# Altium PCB FrontPanel.PcbDoc
Units mil, origin at the board's own origin, x right, y up, seen from the top; angles counter-clockwise.
Board outline 8752 x 5744 mil, 2 copper layers (Top Layer, Bottom Layer); 17 components, 0 nets, 6 pads, 0 vias.
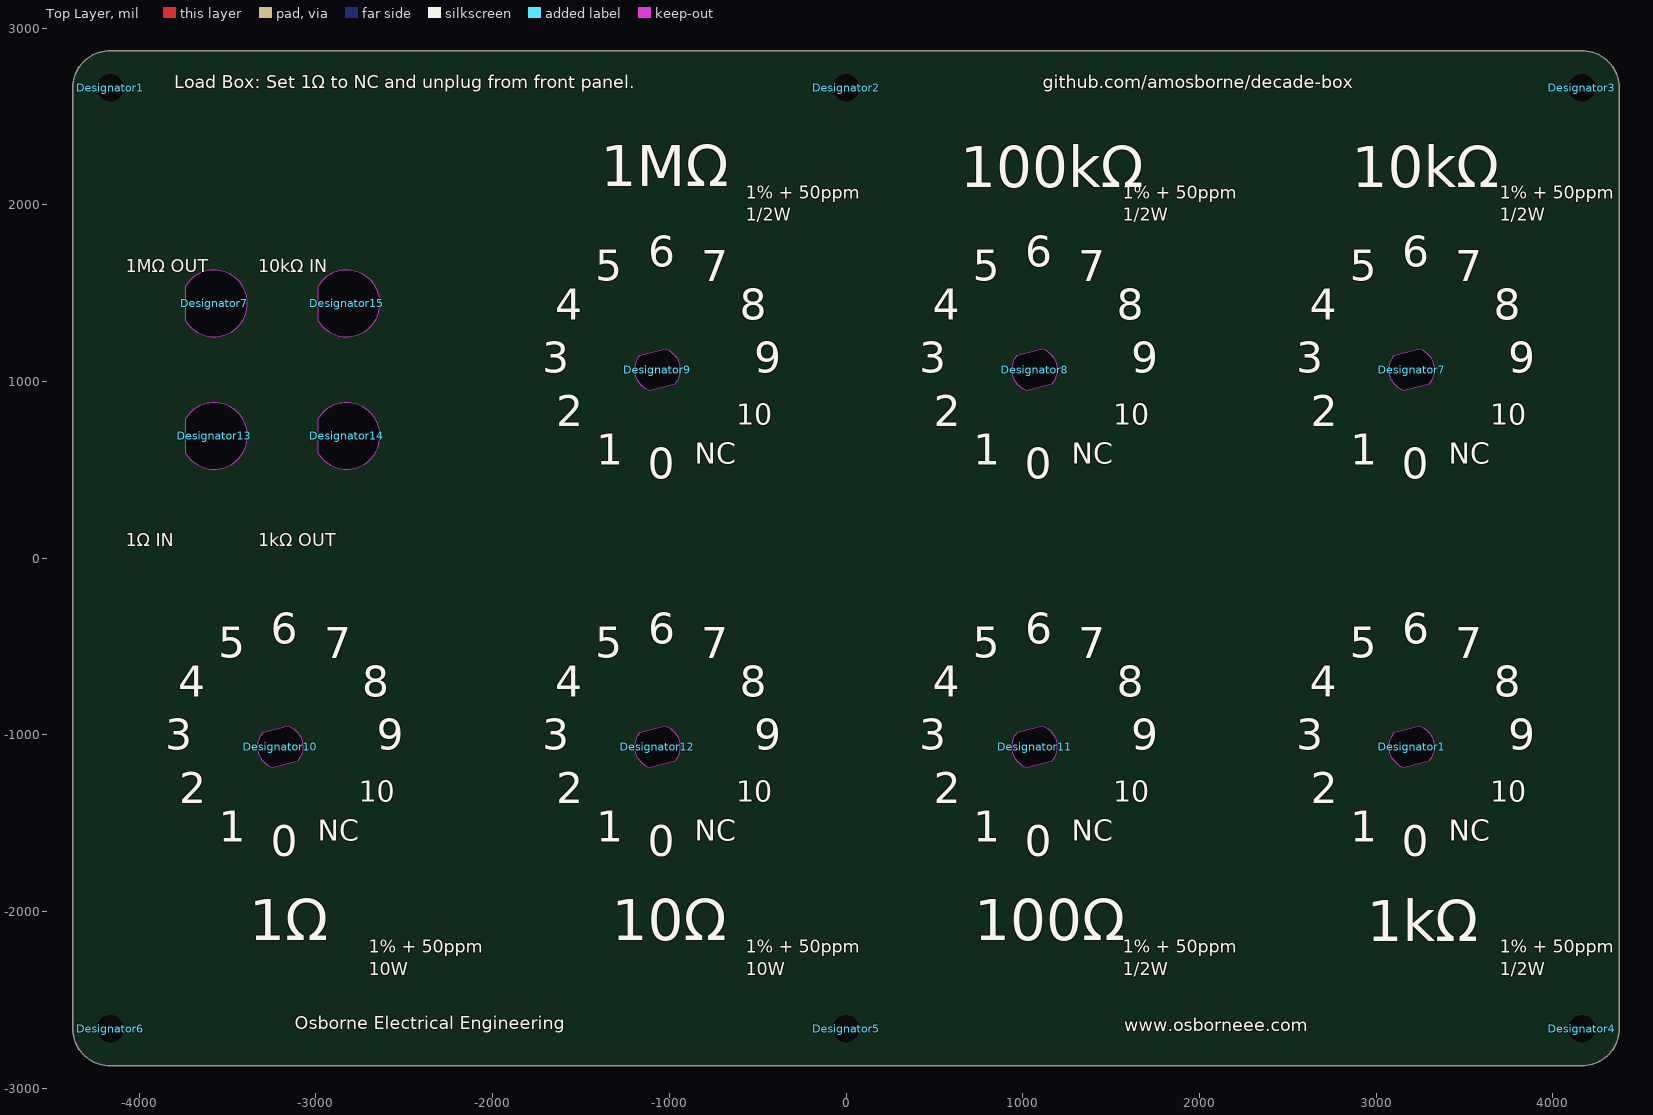
[diagram p0: Top Layer view]
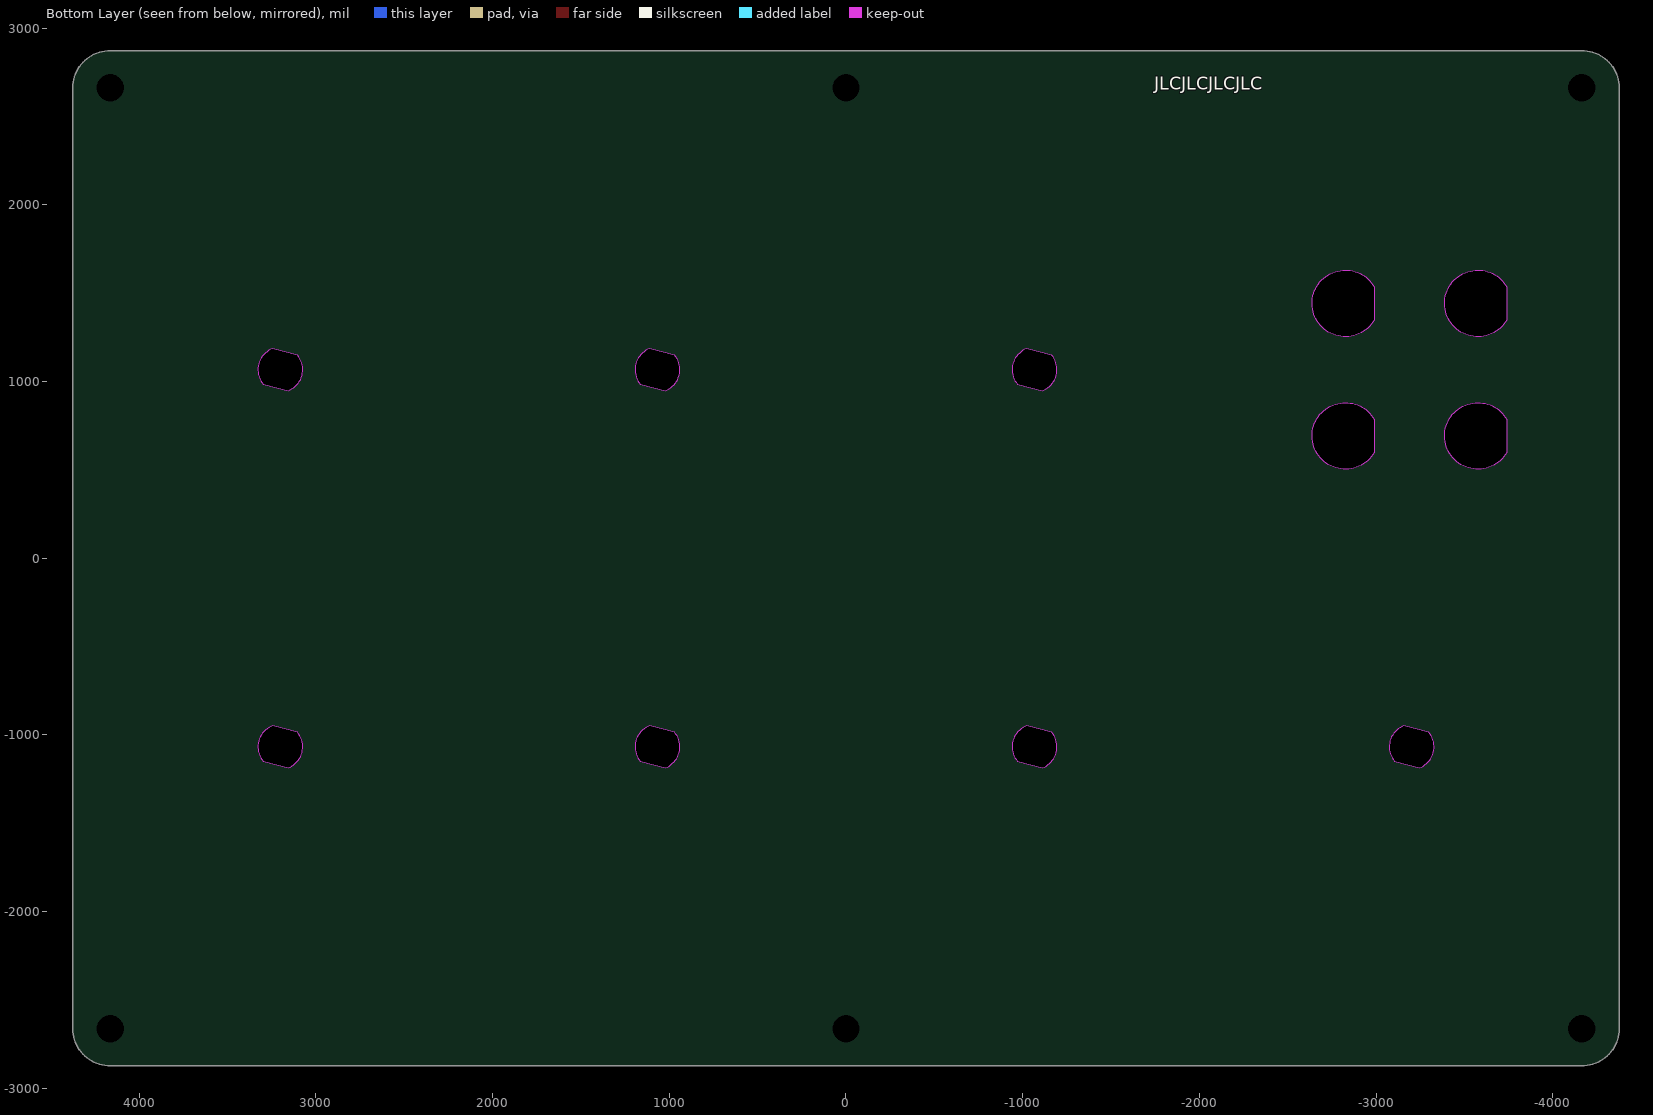
[diagram p1: Bottom Layer view, seen from below]

## Layer stack, top to bottom
Top Solder: solder mask 0.4, Solder Resist, Dk 3.5
Top Layer: signal copper 1.4
Dielectric 1: dielectric 12.6, FR-4, Dk 4.8
Bottom Layer: signal copper 1.4
Bottom Solder: solder mask 0.4, Solder Resist, Dk 3.5

## Board outline
-4376,-2663 ccw(c-4165,-2661) -4163,-2872 4163,-2872 ccw(c4165,-2661) 4376,-2663 4376,2663 ccw(c4165,2661) 4163,2872 -4163,2872 ccw(c-4165,2661) -4376,2663

## Design rules (kind name [scope] priority, off if disabled: settings)
Clearance [All] p1: gap=10 ignorepadtopadclearanceinfootprint=FALSE except(0: Arc-Hole Track-Hole SMDPad-Hole THPad-Hole Via-Hole Fill-Hole Poly-Hole Region-Hole Text-Hole)
PolygonConnect [All] p1: connectstyle=Relief reliefconductorwidth=10 reliefentries=4 polygonreliefangle="90 Angle" airgapwidth=10
RoutingVias [All] p1: holewidth=28 width=50 viastyle="Through Hole" minholewidth=28 minwidth=50 maxholewidth=28 maxwidth=50
SolderMaskExpansion [All] p1: expansion=4 istentingtop=FALSE
Width [All] p1: maxlimit=10 minlimit=10 preferedwidth=10
30 further rules are at their usual default settings.

## Components (designator, comment, footprint, x,y, rotation, side; value= is the part's Value field where it differs from the comment)
Designator1 "Comment" ROTARY 3201,-1067 r285 top
Designator1 "MTGHOLE" MTGHOLE -4163,2663 r0 top locked
Designator2 "MTGHOLE" MTGHOLE 0,2663 r0 top locked
Designator3 "MTGHOLE" MTGHOLE 4163,2663 r0 top locked
Designator4 "MTGHOLE" MTGHOLE 4163,-2663 r0 top locked
Designator5 "MTGHOLE" MTGHOLE 0,-2663 r0 top locked
Designator6 "MTGHOLE" MTGHOLE -4163,-2663 r0 top locked
Designator7 "Comment" BINDING -3576,1442 r90 top
Designator7 "Comment" ROTARY 3201,1067 r285 top
Designator8 "Comment" ROTARY 1067,1067 r285 top
Designator9 "Comment" ROTARY -1067,1067 r285 top
Designator10 "Comment" ROTARY -3201,-1067 r285 top
Designator11 "Comment" ROTARY 1067,-1067 r285 top
Designator12 "Comment" ROTARY -1067,-1067 r285 top
Designator13 "Comment" BINDING -3576,692 r90 top
Designator14 "Comment" BINDING -2826,692 r90 top
Designator15 "Comment" BINDING -2826,1442 r90 top

## Footprints (in the part's own frame and the unit in brackets; to place one, negate y for a bottom-side part, rotate by r counter-clockwise, add the part's x,y. Pads: shape width x height; smd on the part's side, far side on the other; paste and mask are expansions set on the pad)
BINDING [mil]
  Keep-Out Layer board cut-out: -94.05,163.38 -157.38,103.77 -187.22,22.07 -177.2,-64.32 -129.46,-137.03 -54.17,-180.56 32.66,-185.67 112.53,-151.24 168.45,-84.63 188.51,0 188.52,0 177.12,64.55 144.31,121.3 94.05,163.38 94.05,163.38 93.92,163.43 93.79,163.45 93.79,163.45 -93.79,163.45 -93.92,163.43 -94.05,163.38
  body extent -220,-220 220,220, height 810
MTGHOLE [mil]
  round 0 hole 155 unplated: 0(0,0)
ROTARY [mil]
  Keep-Out Layer board cut-out: -104,-72.89 -104,72.89 -58.62,112.66 0,127 58.62,112.66 104,72.89 104,72.89 104,-72.89 58.62,-112.66 0,-127 -58.62,-112.66 -104,-72.89
  body extent -400,-400 413,400, height 700

## Nets (pads, with @x,y where several pads share a name; then routed paths per layer and width w, separated by ;. In a path a pad name is that pad's centre, name@x,y a point inside that pad or via, vN(x,y) a via of type N, cw(c..) or ccw(c..) an arc to the next point about the centre after c; other vN are vias at no path point)
pads on no net: Designator1.0 Designator2.0 Designator3.0 Designator4.0 Designator5.0 Designator6.0

## Silkscreen, mask and mechanical layers (free items; w line width, h text height)
Top Overlay:
  text "Load Box: Set 1Ω to NC and unplug from front panel." at -3801.82,2634.48 h125
  text "github.com/amosborne/decade-box" at 1114.74,2634.42 h125
  text "1MΩ" at -1386.57,2029.21 h400
  text "100kΩ" at 645.78,2024.39 h400
  text "10kΩ" at 2862.92,2024.39 h400
  text "1% + 50ppm / 1/2W" at -567,1884 h125
  text "1% + 50ppm / 1/2W" at 1567,1884 h125
  text "1% + 50ppm / 1/2W" at 3701,1884 h125
  text "1MΩ OUT" at -4076,1592 h125
  text "10kΩ IN" at -3326,1592 h125
  text "1Ω IN" at -4076,42 h125
  text "1kΩ OUT" at -3326,42 h125
  text "10Ω" at -1326.4,-2237.5 h400
  text "100Ω" at 724.47,-2237.5 h400
  text "1Ω" at -3377.26,-2239.35 h400
  text "1kΩ" at 2946.05,-2244.9 h400
  text "1% + 50ppm / 10W" at -2701,-2384 h125
  text "1% + 50ppm / 10W" at -567,-2384 h125
  text "1% + 50ppm / 1/2W" at 1567,-2384 h125
  text "1% + 50ppm / 1/2W" at 3701,-2384 h125
  text "Osborne Electrical Engineering" at -3119.24,-2691.58 h125
  text "www.osborneee.com" at 1574.94,-2702.45 h125
Bottom Overlay:
  text "JLCJLCJLCJLC" at -1744.09,2626.61 h125
Board Shape:
  the board outline again, w1

## Dimensions
-4000,-2000 to -3000,-2000 on Mechanical 4
-4000,-2000 to -4000,-1000 on Mechanical 4

## Text inside footprints (layer, text, board x,y; h text height)
Designator1: Top Overlay "9" at 3747.4,-1144.62 h300; Top Overlay "0" at 3145.46,-1744.62 h300; Top Overlay "8" at 3665.77,-844.62 h300; Top Overlay "7" at 3448.51,-624.59 h300; Top Overlay "6" at 3147.54,-544.62 h300; Top Overlay "5" at 2850.18,-623.61 h300; Top Overlay "4" at 2623.76,-844.62 h300; Top Overlay "3" at 2549.07,-1144.62 h300; Top Overlay "2" at 2629.32,-1446.01 h300; Top Overlay "1" at 2853.37,-1664.79 h300; Top Overlay "10" at 3645.65,-1418.74 h200; Top Overlay "NC" at 3411.23,-1638.35 h200
Designator7: Top Overlay "NC" at 3411.23,495.65 h200; Top Overlay "10" at 3645.65,715.26 h200; Top Overlay "1" at 2853.37,469.21 h300; Top Overlay "2" at 2629.32,687.99 h300; Top Overlay "3" at 2549.07,989.38 h300; Top Overlay "4" at 2623.76,1289.38 h300; Top Overlay "5" at 2850.18,1510.39 h300; Top Overlay "6" at 3147.54,1589.38 h300; Top Overlay "7" at 3448.51,1509.41 h300; Top Overlay "8" at 3665.77,1289.38 h300; Top Overlay "0" at 3145.46,389.38 h300; Top Overlay "9" at 3747.4,989.38 h300
Designator8: Top Overlay "9" at 1613.4,989.38 h300; Top Overlay "0" at 1011.46,389.38 h300; Top Overlay "8" at 1531.77,1289.38 h300; Top Overlay "7" at 1314.51,1509.41 h300; Top Overlay "6" at 1013.54,1589.38 h300; Top Overlay "5" at 716.18,1510.39 h300; Top Overlay "4" at 489.76,1289.38 h300; Top Overlay "3" at 415.07,989.38 h300; Top Overlay "2" at 495.32,687.99 h300; Top Overlay "1" at 719.37,469.21 h300; Top Overlay "10" at 1511.65,715.26 h200; Top Overlay "NC" at 1277.23,495.65 h200
Designator9: Top Overlay "NC" at -856.77,495.65 h200; Top Overlay "10" at -622.35,715.26 h200; Top Overlay "1" at -1414.63,469.21 h300; Top Overlay "2" at -1638.68,687.99 h300; Top Overlay "3" at -1718.93,989.38 h300; Top Overlay "4" at -1644.24,1289.38 h300; Top Overlay "5" at -1417.82,1510.39 h300; Top Overlay "6" at -1120.46,1589.38 h300; Top Overlay "7" at -819.49,1509.41 h300; Top Overlay "8" at -602.23,1289.38 h300; Top Overlay "0" at -1122.54,389.38 h300; Top Overlay "9" at -520.6,989.38 h300
Designator10: Top Overlay "9" at -2654.6,-1144.62 h300; Top Overlay "0" at -3256.54,-1744.62 h300; Top Overlay "8" at -2736.23,-844.62 h300; Top Overlay "7" at -2953.49,-624.59 h300; Top Overlay "6" at -3254.46,-544.62 h300; Top Overlay "5" at -3551.82,-623.61 h300; Top Overlay "4" at -3778.24,-844.62 h300; Top Overlay "3" at -3852.93,-1144.62 h300; Top Overlay "2" at -3772.68,-1446.01 h300; Top Overlay "1" at -3548.63,-1664.79 h300; Top Overlay "10" at -2756.35,-1418.74 h200; Top Overlay "NC" at -2990.77,-1638.35 h200
Designator11: Top Overlay "NC" at 1277.23,-1638.35 h200; Top Overlay "10" at 1511.65,-1418.74 h200; Top Overlay "1" at 719.37,-1664.79 h300; Top Overlay "2" at 495.32,-1446.01 h300; Top Overlay "3" at 415.07,-1144.62 h300; Top Overlay "4" at 489.76,-844.62 h300; Top Overlay "5" at 716.18,-623.61 h300; Top Overlay "6" at 1013.54,-544.62 h300; Top Overlay "7" at 1314.51,-624.59 h300; Top Overlay "8" at 1531.77,-844.62 h300; Top Overlay "0" at 1011.46,-1744.62 h300; Top Overlay "9" at 1613.4,-1144.62 h300
Designator12: Top Overlay "9" at -520.6,-1144.62 h300; Top Overlay "0" at -1122.54,-1744.62 h300; Top Overlay "8" at -602.23,-844.62 h300; Top Overlay "7" at -819.49,-624.59 h300; Top Overlay "6" at -1120.46,-544.62 h300; Top Overlay "5" at -1417.82,-623.61 h300; Top Overlay "4" at -1644.24,-844.62 h300; Top Overlay "3" at -1718.93,-1144.62 h300; Top Overlay "2" at -1638.68,-1446.01 h300; Top Overlay "1" at -1414.63,-1664.79 h300; Top Overlay "10" at -622.35,-1418.74 h200; Top Overlay "NC" at -856.77,-1638.35 h200